# EAGLE board USBPowerSupply (EAGLE 6.1)
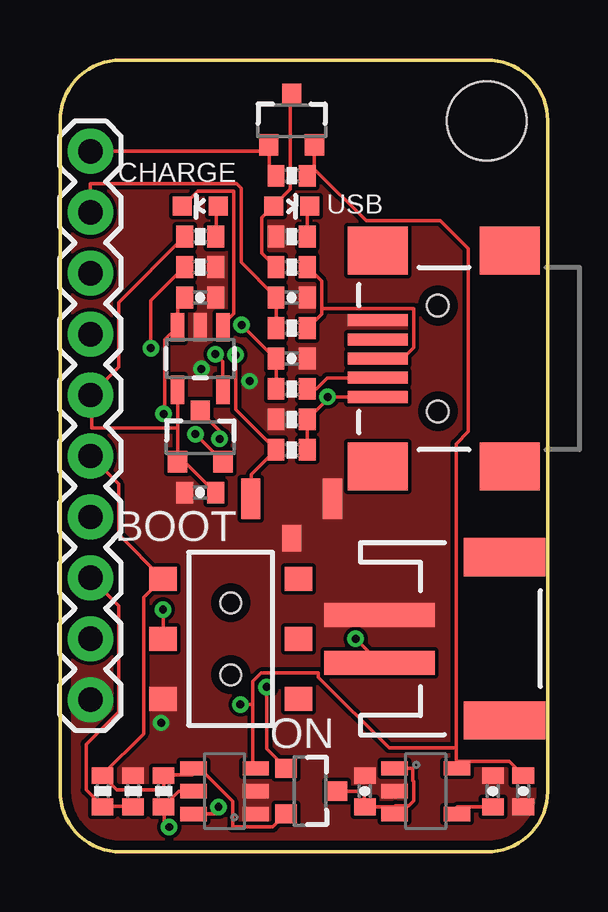
[diagram p0: board, top side]
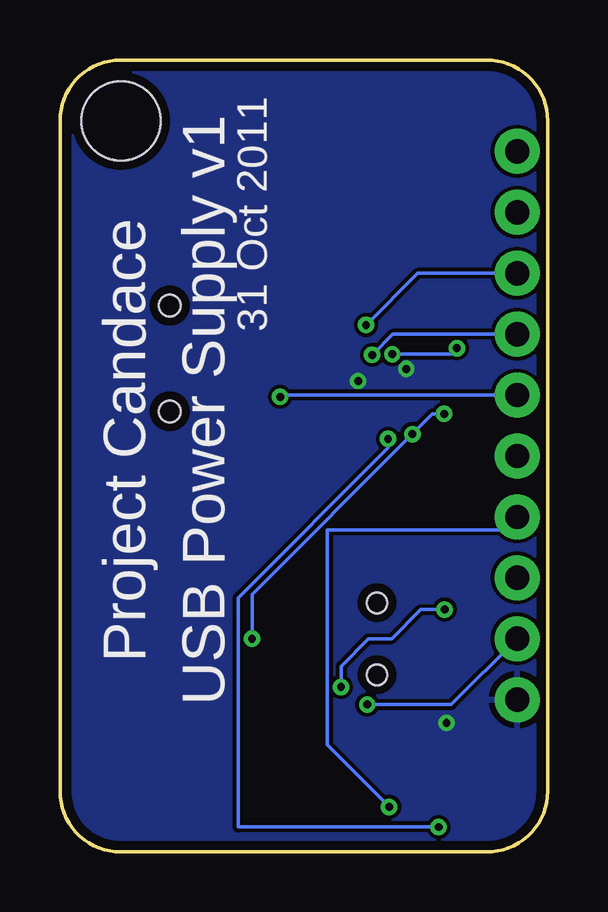
[diagram p1: board, bottom side, seen from below]

Size 20.32 x 33.02 mm. Coordinates in mm from the lower left corner, seen from the top.
Outline: 2.54,33.02 17.78,33.02 arc-90 20.32,30.48 20.32,2.54 arc-90 17.78,0 2.54,0 arc-90 0,2.54 0,30.48 arc-90 2.54,33.02
Copper layers (1*16): Top 0.0356mm / dielectric 1.5011mm / Bottom 0.0356mm
Design rules: minimum track width 6mil, minimum drill 13mil, track to track 6mil, track to pad 6mil, pad to pad 6mil, via to via 6mil, smd to smd 6mil, copper to edge 15mil, drill to drill 6mil, minimum pad ring 7mil, minimum via ring 7mil, stop-mask expansion 4mil, vias tented up to drill 14mil, thermal gap 10mil
Net classes: 0 default: width 0.152 mm, drill 0.33 mm, clearance 0.152 mm; 1 power: width 0.152 mm, drill 0.33 mm, clearance 0.152 mm to class 0, clearance 0.152 mm; 2 hv: width 0.152 mm, drill 0.33 mm, clearance 0.152 mm to class 0, clearance 0.152 mm to class 1, clearance 0.152 mm
vRestrict: area 13.5,24.9 to 14.2,25.7; area 13.5,27.4 to 13.7,27.7

## Footprints (pad centres in the part's own frame; a part is rotated, then mirrored left to right if it is on the bottom)
0402-CAP = smd 0.7 x 0.9: 1 -0.65,0; 2 0.65,0
LED-0603 = smd 0.8 x 0.8: A 0,-0.75; C 0,0.75
SOT-23-3 = smd 0.9 x 0.8: 1 -1,0.95; 2 -1,-0.95; 3 1.1,0
USB-MINIB = smd 2.5 x 0.5: D+ 2.5,0; D- 2.5,0.8; GND 2.5,-1.6; ID 2.5,-0.8; VBUS 2.5,1.6 | smd 2.5 x 2: MTN1 -3,4.5; MTN2 2.5,4.5; MTN3 -3,-4.5; MTN4 2.5,-4.5 | hole 0.9: 0,2.2; 0,-2.2
1X10 = drill 1.016 pad 1.88: 1 0,0; 2 2.54,0; 3 5.08,0; 4 7.62,0; 5 10.16,0; 6 12.7,0; 7 15.24,0; 8 17.78,0; 9 20.32,0; 10 22.86,0
JST-2-SMD = smd 1 x 4.6: 1 -1,-3.7; 2 1,-3.7 | smd 1.6 x 3.4: NC1 -3.4,1.5; NC2 3.4,1.5
STAND-OFF = hole 3.302: 0,0
SOT23-3 = smd 0.8 x 0.9: 1 -0.95,-1; 2 0.95,-1; 3 0,1.1
0402-RES = smd 0.7 x 0.9: 1 -0.65,0; 2 0.65,0
B3U-1100P = smd 0.8 x 1.7: P$1 -1.7,0; P$2 1.7,0 | smd 0.8 x 1.1: P$3 0,-1.65
AYZ0202 = smd 1 x 1.15: 1 -2.5,2.825; 2 0,2.825; 3 2.5,2.825; 4 -2.5,-2.825; 5 0,-2.825; 6 2.5,-2.825 | hole 0.85: 1.5,0; -1.5,0
SOT-23-5 = smd 0.6 x 1.1: 1 -0.95,-1.3; 2 0,-1.3; 3 0.95,-1.3; 4 0.95,1.3; 5 -0.95,1.3
SOT-23-6 = smd 0.6 x 1.1: 1 -0.95,-1.3; 2 0,-1.3; 3 0.95,-1.3; 4 0.95,1.3; 5 0,1.3; 6 -0.95,1.3
SOT23-5 = smd 0.55 x 1.2: 1 -0.95,-1.3; 2 0,-1.3; 3 0.95,-1.3; 4 0.95,1.3; 5 -0.95,1.3

## Placement (x,y rotation side)
C020  18pF  [0402-CAP]  9.65,20.57 0 top
C030  18pF  [0402-CAP]  9.65,23.11 0 top
C201  4.7uF  [0402-CAP]  19.3,2.54 270 top
C203  100nF  [0402-CAP]  18.03,2.54 90 top
C204  1uF  [0402-CAP]  12.7,2.54 90 top
C301  4.7uF  [0402-CAP]  5.84,23.11 0 top
C302  4.7uF  [0402-CAP]  5.84,14.99 180 top
D050  RED  [LED-0603]  9.65,26.92 270 top
D301  RED  [LED-0603]  5.84,26.92 90 top
D302  DCC  [SOT-23-3]  5.84,17.27 90 top
J001  USBSMD  [USB-MINIB]  15.75,20.57 180 top
J004  M10  [1X10]  1.27,6.35 90 top
J301  JST 2mm  [JST-2-SMD]  17.02,8.89 270 top
JP1  STAND-OFF  [STAND-OFF]  17.78,30.48 0 top
Q050  PMOS  [SOT23-3]  9.65,30.48 0 top
Q201  PMOS  [SOT23-3]  10.41,2.54 270 top
R010  10k  [0402-RES]  9.65,16.76 0 top
R011  100k  [0402-RES]  9.65,18.03 0 top
R020  33  [0402-RES]  9.65,19.3 0 top
R030  33  [0402-RES]  9.65,21.84 0 top
R031  1.5k  [0402-RES]  9.65,24.38 0 top
R050  1.5k  [0402-RES]  9.65,25.65 180 top
R051  10k  [0402-RES]  9.65,28.19 180 top
R201  100k  [0402-RES]  1.78,2.54 90 top
R202  100k  [0402-RES]  3.05,2.54 270 top
R203  0.047  [0402-RES]  4.32,2.54 90 top
R301  10k  [0402-RES]  5.84,24.38 180 top
R302  1.5k  [0402-RES]  5.84,25.65 180 top
S010  SPST  [B3U-1100P]  9.65,14.73 0 top
S201  SPDT  [AYZ0202]  7.11,8.89 90 top
U201  5319  [SOT-23-5]  15.24,2.54 270 top
U202  4173  [SOT-23-6]  6.86,2.54 90 top
U301  73831  [SOT23-5]  5.84,20.57 180 top

## Library data of the parts
C020 C030 C201 C203 C204 C301 C302 D050 D301 J001 J004 J301 JP1 Q050 Q201 R010 R011 R020 R030 R031 R050 R051 R201-R203 R301 R302 S201 U301 = SparkFun
D302 S010 U201 U202 = KwanSystems

## Nets
BATLVL: J004.3 R201.1 R202.2
CONN_D+: J001.D+ R030.2 R031.2
CONN_D-: J001.D- R020.2
CURRENT: J004.4 U202.6
GND: C020.2 C030.2 C201.2 C203.2 C204.2 C301.2 C302.2 J001.GND J004.1 J301.1 R011.1 R050.2 R202.1 R301.1 S010.P$2 S010.P$3 S201.1 U201.2 U202.1 U202.2 U301.2
N$1: D301.A R302.1
N$2: R301.2 U301.5
N$3: D301.C U301.1
N$6: D050.A Q050.3 R031.1
N$7: D050.C R050.1
N$10: Q201.1 S201.2
N$17: C203.1 U201.4
RAW: C204.1 Q201.3 U201.1 U201.3
USB_ON: J004.7 R010.1 S010.P$1
USB_SOFTCONNECT: J004.10 Q050.1 R051.2
USBD+: C030.1 J004.9 R030.1
USBD-: C020.1 J004.8 R020.1
VBUS [power]: C302.1 D302.1 J001.VBUS J004.6 R010.2 R011.2 R302.2 U301.4
VCC: C201.1 J004.2 Q050.2 R051.1 U201.5 U202.3
VIN+: D302.3 R203.1 U202.5
VIN-: J004.5 Q201.2 R201.2 R203.2 S201.3 U202.4
VLIPO [power]: C301.1 D302.2 J301.2 U301.3

## Tracks (layer width: path | path; a pad name or v marks a point on that pad's centre or on a via)
BATLVL
  Top 0.152: R202.2 3.05,1.91 1.78,1.91 R201.1 1.73,1.96 1.09,2.59 1.09,4.5 2.44,5.84 2.44,10.26 J004.3
CONN_D+
  Top 0.152: 10.9,22.66 10.9,23.8 10.31,24.38 R031.2 | 10.9,22.66 10.9,22.43 10.31,21.84 R030.2 | 10.9,22.66 14.73,22.66 14.73,21.03 14.27,20.57 J001.D+
CONN_D-
  Top 0.152: R020.2 10.67,19.3 11.12,19.76 13.23,19.76 J001.D-
CURRENT  (via drill 0.33)
  Top 0.152: v6.6,1.88 6.6,1.6 U202.6
  Bottom 0.152: v6.6,1.88 9.2,4.47 9.2,13.44 1.8,13.44 J004.4
GND  (via drill 0.33)
  Top 0.152: 19.3,1.91 C201.2 | 18.03,3.18 C203.2 | 12.7,3.18 C204.2 | 4.27,6.38 S201.1 | 11.33,14.73 S010.P$2 11.2,14.71 | 6.5,24.38 R301.1 | 9.02,18.03 R011.1 | 10.29,20.57 C020.2 | 10.29,23.11 C030.2 | 9.02,25.65 R050.2 | 13.23,22.15 J001.GND | 13.31,9.91 J301.1
  other vias: 4.22,5.38 5.89,20.14 7.9,19.63
  pour Bottom: 2.54,33.02 17.78,33.02 arc-90 20.32,30.48 20.32,2.54 arc-90 17.78,0 2.54,0 arc-90 0,2.54 0,30.48 arc-90
  pour Top (no thermals): 2.54,33.02 17.78,33.02 arc-90 20.32,30.48 20.32,2.54 arc-90 17.78,0 2.54,0 arc-90 0,2.54 0,30.48 arc-90
N$1
  Top 0.152: D301.A 6.5,26.85 6.5,25.65 R302.1
N$2  (via drill 0.33)
  Top 0.152: v3.78,21.01 3.78,22.99 R301.2 | v6.48,20.75 6.78,20.45 U301.5
  Bottom 0.152: v3.78,21.01 4.04,20.75 v6.48,20.75
N$3
  Top 0.152: D301.C 5.1,26.92 5.74,27.56 7.24,27.56 7.24,22.45 6.81,22.02 6.81,21.9 U301.1
N$6
  Top 0.152: R031.1 8.41,24.97 8.41,26.44 D050.A 8.94,26.98 9.6,27.64 9.6,31.52 Q050.3
N$7
  Top 0.152: D050.C 10.31,26.85 10.31,25.65 R050.1
N$10  (via drill 0.33)
  Top 0.152: v8.61,6.88 8.61,4.29 9.4,3.51 Q201.1 | S201.2 v4.29,10.11 | S201.2 4.29,8.51 | S201.2
  Bottom 0.152: v8.61,6.88 8.61,7.75 7.47,8.89 6.5,8.89 5.28,10.11 v4.29,10.11
N$17
  Top 0.152: C203.1 16.56,1.88 16.56,1.6 U201.4
RAW
  Top 0.152: 13.92,1.88 C204.1 12.67,1.96 12.67,2.54 Q201.3 | 13.92,1.88 13.92,1.6 U201.3 | U201.1 14.71,3.48 14.71,2.97 14.73,2.95 14.73,2.13 14.53,1.93 13.97,1.93 13.92,1.88
USB_ON  (via drill 0.33)
  Top 0.152: S010.P$1 7.98,14.73 7.98,15.75 R010.1 8.94,16.81 7.31,18.44 v7.31,20.73
  Bottom 0.152: v7.31,20.73 6.45,21.59 J004.7
USB_SOFTCONNECT
  Top 0.152: R051.2 8.71,28.47 8.71,29.46 Q050.1 8.66,29.21 J004.10
USBD+
  Top 0.152: R030.1 9.02,21.84 9.02,23.11 C030.1 8.97,23.16 7.54,24.59 7.54,27.69 7.37,27.86 1.27,27.86 J004.9
USBD-  (via drill 0.33)
  Top 0.152: R020.1 9.02,19.3 9.02,20.57 C020.1 8.94,20.6 v7.57,21.97
  Bottom 0.152: v7.57,21.97 5.41,24.13 J004.8
VBUS  (via drill 0.33)
  Top 0.152: R010.2 10.31,16.76 10.31,18.03 R011.2 10.36,18.09 11.2,18.92 | 11.2,18.92 11.25,18.97 13.23,18.97 J001.VBUS | 4.9,17.68 4.9,19.25 U301.4 | 4.9,17.68 4.9,16.28 D302.1 4.95,16.51 6.48,14.99 C302.1 | R302.2 2.44,22.91 2.44,20.22 J004.6 1.32,19 1.32,17.68 4.9,17.68 | v11.15,18.97 11.2,18.92
  Bottom 0.152: v11.15,18.97 11.07,19.05 J004.6
VCC  (via drill 0.33)
  Top 0.152: Q050.2 10.59,29.46 10.59,28.47 10.31,28.19 R051.1 10.64,28.42 12.75,26.31 15.85,26.31 17.02,25.15 17.02,17.53 16.51,17.02 16.51,4.34 | 16.56,3.79 18.72,3.79 C201.1 | 16.56,3.79 16.56,3.51 U201.5 | 8.03,6.15 8.03,3.63 8.15,3.51 U202.3 | 16.51,4.34 13.72,4.34 10.77,7.29 10.77,7.47 8.38,7.47 8.03,7.11 8.03,6.15 | 16.51,4.34 16.51,3.83 16.56,3.79 | v7.52,6.15 8.03,6.15
  Bottom 0.152: J004.2 4.01,6.15 v7.52,6.15
VIN+  (via drill 0.33)
  Top 0.152: U202.5 4.95,2.54 4.32,1.91 R203.1 4.34,1.83 4.34,1.25 v4.55,1.04 | v6.66,17.22 6.66,17.55 D302.3
  Bottom 0.152: v6.66,17.22 6.66,16.84 12.9,10.59 12.9,1.04 v4.55,1.04
VIN-
  Top 0.152: Q201.2 9.4,1.58 8.87,1.04 7.19,1.04 7.19,2.11 5.82,3.48 U202.4 5.51,3.43 5.51,3.23 4.37,3.23 R203.2 4.32,2.59 2.36,2.59 1.78,3.18 R201.2 1.8,3.25 3.48,4.93 3.48,10.62 4.22,11.35 S201.3 4.27,11.4 2.44,13.23 2.44,15.34 J004.5
VLIPO  (via drill 0.33)
  Top 0.152: v5.64,17.42 6.78,16.28 D302.2 | v4.32,18.26 4.37,18.31 4.37,21.36 4.88,21.87 U301.3 4.9,21.95 4.9,22.84 C301.1 | v12.32,8.89 J301.2
  Bottom 0.152: v4.32,18.26 4.8,18.26 v5.64,17.42 12.32,10.74 v12.32,8.89

## Text on the board
tPlace: CHARGE | USB | BOOT | ON
bPlace: 31 Oct 2011 | USB Power Supply v1 | Project Candace
Document: Released under the Creative Commons | Attribution Share-Alike 3.0 License | http://creativecommons.org/licenses/by-sa/3.0 | Original design by C. Taylor and N. Seidle | Sparkfun Electronics http://www.sparkfun.com/products/10216 | Heavily modified by C. Jeppesen | St Kwan's Home for the Terminally ADD, stkwans.blogspot.com